# EAGLE board new-mainboard (EAGLE 9.5.2)
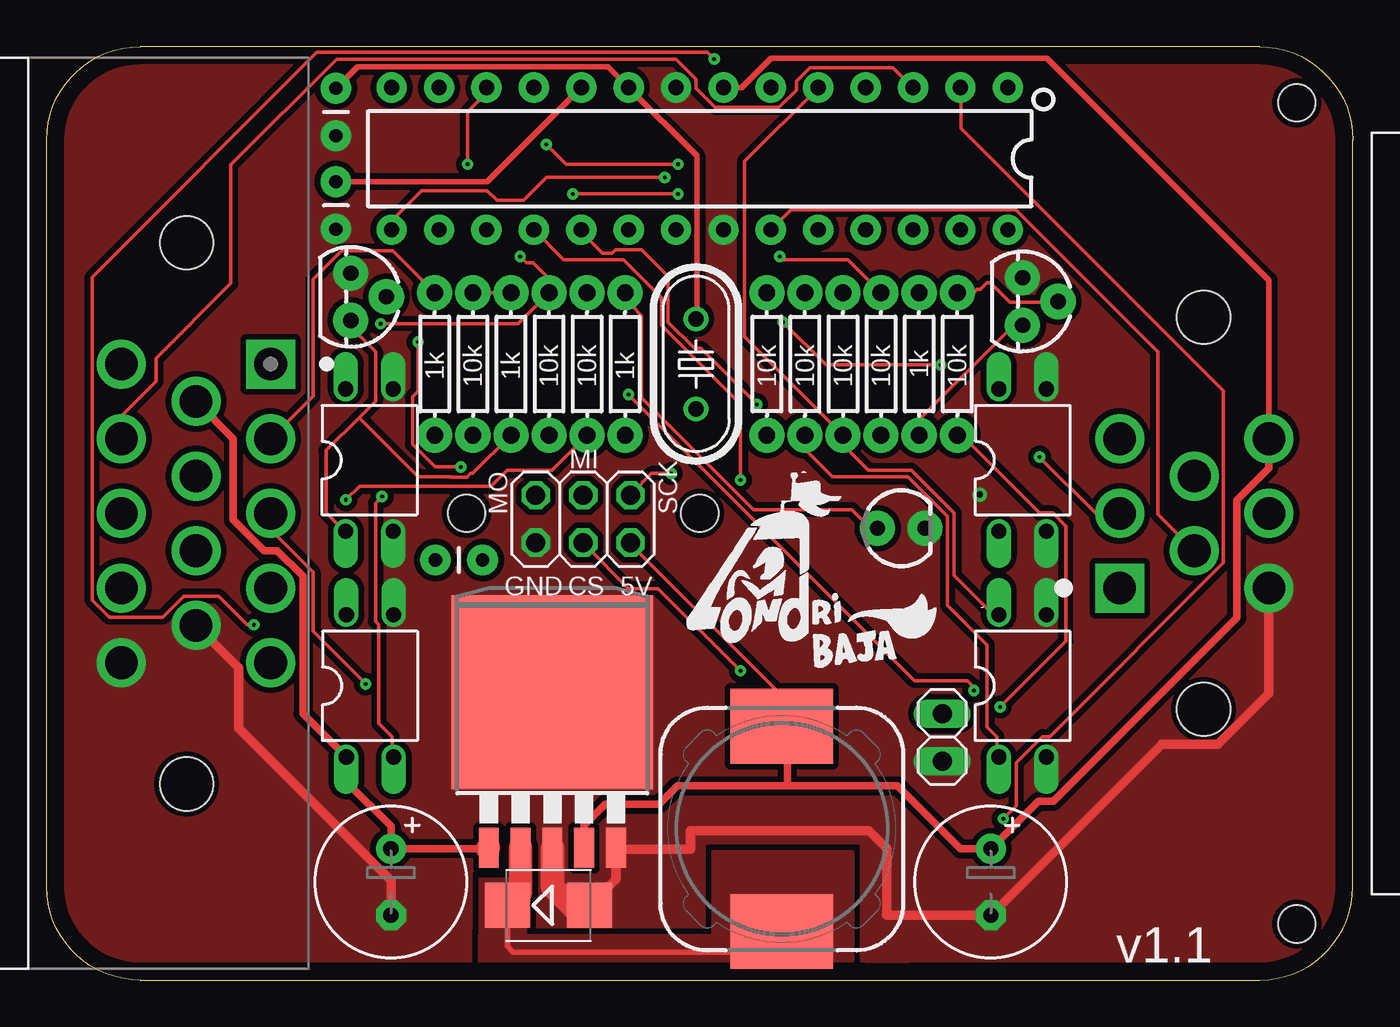
[diagram p0: board, top side]
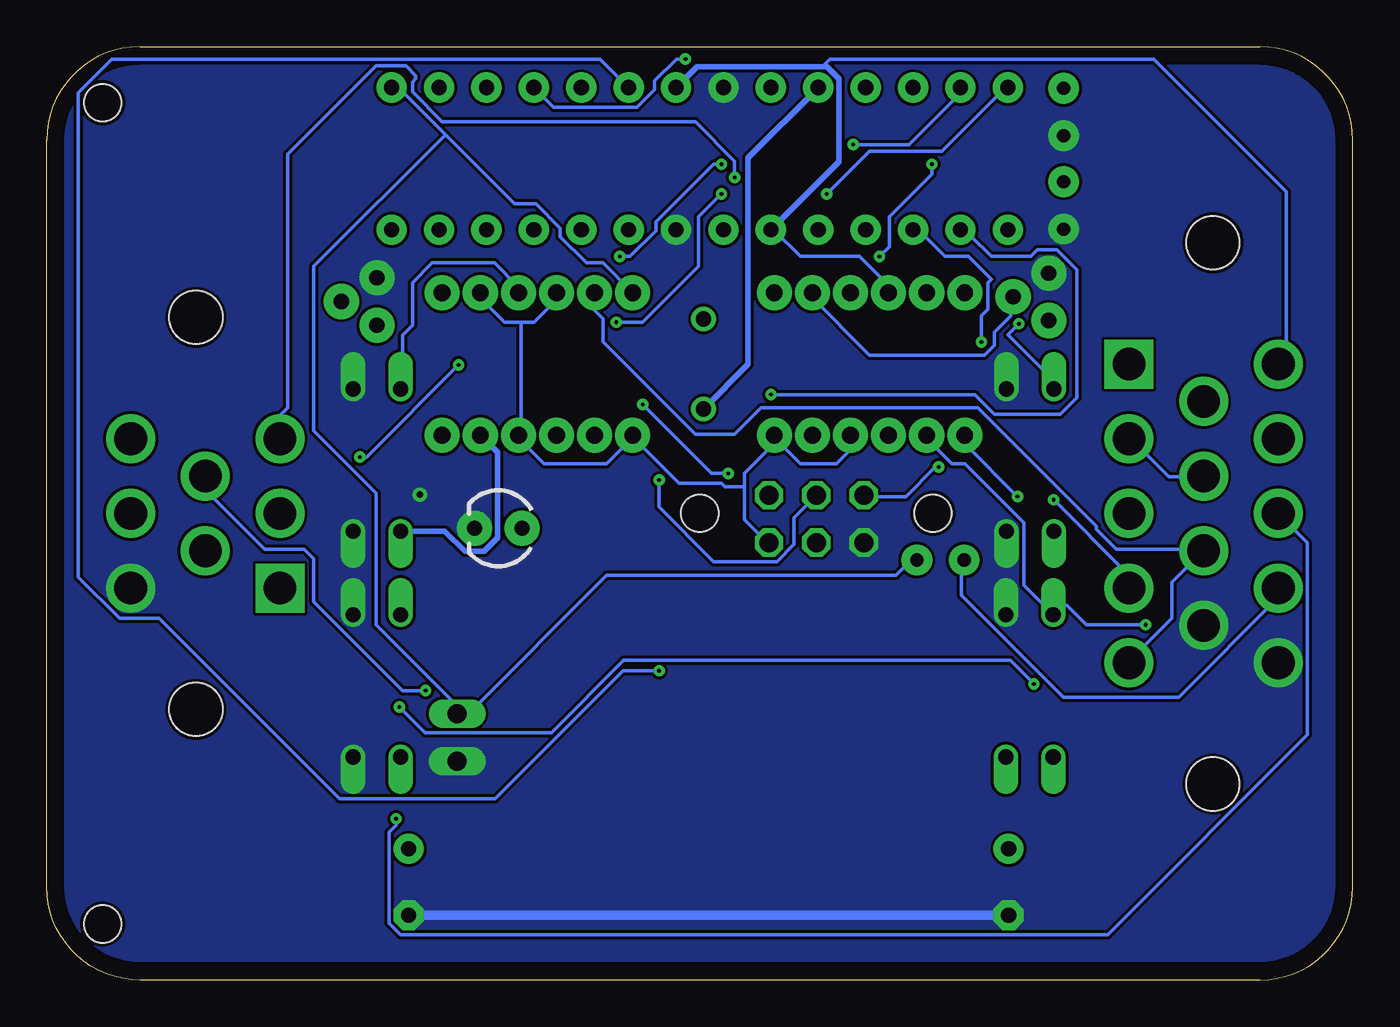
[diagram p1: board, bottom side, seen from below]

Size 70 x 50 mm. Coordinates in mm from the lower left corner, seen from the top.
Outline: 5,0 arc-90 0,5 0,45 arc-90 5,50 65,50 arc-90 70,45 70,5 arc-90 65,0 5,0
Copper layers (1*16): Top 0.035mm / dielectric 1.5mm / Bottom 0.035mm
Design rules "default *": minimum track width 0.2mm, minimum drill 0.2mm, track to track 6mil, track to pad 6mil, pad to pad 6mil, via to via 6mil, smd to smd 6mil, copper to edge 0.2mm, drill to drill 6mil, minimum pad ring 10mil, minimum via ring 8mil, stop-mask expansion 4mil, vias tented up to drill 0mil, thermal gap 10mil
Net classes: 0 default: width 0.125 mm
Holes 2 mm at 67,47 22.5,25 67,3 35,25

## Footprints (pad centres in the part's own frame; a part is rotated, then mirrored left to right if it is on the bottom)
CAP-PTH-2.54 = drill 0.7 pad 1.651: 1 -1.27,0; 2 1.27,0
E3,5-8 = drill 0.813 pad 1.6: + -1.778,0 | drill 0.813 pad 1.6 octagon: - 1.778,0
SMB = smd 2.4 x 2.4: A 2.2,0; C -2.2,0
LED_3MM = drill 0.813 pad 1.88: A -1.27,0; K 1.27,0
TO263-5 = smd 1.067 x 2.159: 1 -3.404,-5.791; 2 -1.702,-5.791; 3 0,-5.791; 4 1.702,-5.791; 5 3.404,-5.791 | smd 10.8 x 10.41: 6 0,2.54
TE_776266-1 = drill 1.75 square: 1 -8,4 | drill 1.75: 2 -4,4; 3 0,4; 4 4,4; 5 8,4; 6 -6,0; 7 -2,0; 8 2,0; 9 6,0; 10 -8,-4; 11 -4,-4; 12 0,-4; 13 4,-4; 14 8,-4 | hole 2.85: -14.5,-0.5; 14.5,-0.5
TE_1-776280-1 = drill 1.75 square: 1 -4,4.5 | drill 1.75: 2 0,4.5; 3 4,4.5; 4 -2,0.5; 5 2,0.5; 6 -4,-3.5; 7 0,-3.5; 8 4,-3.5 | hole 2.85: -10.5,0; 10.5,0
1X02 = drill 1.016 long: 1 -1.27,0; 2 1.27,0
2X03 = drill 1.016 octagon: 1 -2.54,-1.27; 2 -2.54,1.27; 3 0,-1.27; 4 0,1.27; 5 2.54,-1.27; 6 2.54,1.27
CDRH127/LD = smd 4 x 5.5: 1 -5.5,0; 2 5.5,0
DIL04 = drill 0.813 offset: 1 -1.27,-3.81; 2 1.27,-3.81; 3 1.27,3.81; 4 -1.27,3.81
TO-92 = drill 0.813 pad 1.88: 1 -1.27,0; 2 0,1.905; 3 1.27,0
HC49U-V = drill 0.813: 1 -2.413,0; 2 2.413,0
AXIAL-0.3 = drill 0.9 pad 1.88: P$1 -3.81,0; P$2 3.81,0
DIP28 = drill 0.813 pad 1.626: 1 -16.51,-3.81; 2 -13.97,-3.81; 3 -11.43,-3.81; 4 -8.89,-3.81; 5 -6.35,-3.81; 6 -3.81,-3.81; 7 -1.27,-3.81; 8 1.27,-3.81; 9 3.81,-3.81; 10 6.35,-3.81; 11 8.89,-3.81; 12 11.43,-3.81; 13 13.97,-3.81; 14 16.51,-3.81; 15 16.51,3.81; 16 13.97,3.81; 17 11.43,3.81; 18 8.89,3.81; 19 6.35,3.81; 20 3.81,3.81; 21 1.27,3.81; 22 -1.27,3.81; 23 -3.81,3.81; 24 -6.35,3.81; 25 -8.89,3.81; 26 -11.43,3.81; 27 -13.97,3.81; 28 -16.51,3.81

## Placement (x,y rotation side)
C1  22pF  [CAP-PTH-2.54]  15.5,46.5 270 top
C2  100uF/50V  [E3,5-8]  18.45,5.25 270 top
C3  100uF/50V  [E3,5-8]  50.6,5.25 270 top
C4  100nF  [CAP-PTH-2.54]  22.1,22.5 180 top
C6  22pF  [CAP-PTH-2.54]  15.5,41.5 270 top
D2  [SMB]  26.9,4 0 top
D5  [LED_3MM]  45.8,24.2 0 top
IC2  5V  [TO263-5]  27.1,12.88 0 top
J1  776266-1  [TE_776266-1]  8,25 270 top
J2  1-776280-1  [TE_1-776280-1]  62,25 90 top
JP1  [1X02]  48,13 270 top
JP2  [2X03]  28.75,24.7 0 top
L2  CDRH127/LD  [CDRH127/LD]  39.4,8.09 90 top
OK1  PC817  [DIL04]  52.3,27.85 0 top
OK2  PC817  [DIL04]  17.33,15.76 0 top
OK3  PC817  [DIL04]  17.3,27.85 0 top
OK4  PC817  [DIL04]  52.3,15.76 0 top
Q1  200mA/40V  [TO-92]  52.3,36.35 270 top
Q2  200mA/40V  [TO-92]  16.3,36.6 270 top
Q3  16Mhz  [HC49U-V]  34.8,33 270 top
R1  10k  [AXIAL-0.3]  44.72,33 270 top
R2  10k  [AXIAL-0.3]  26.92,33 270 top
R3  10k  [AXIAL-0.3]  22.84,33 90 top
R4  1k  [AXIAL-0.3]  46.76,33 90 top
R5  10k  [AXIAL-0.3]  42.68,33 90 top
R6  1k  [AXIAL-0.3]  24.88,33 90 top
R7  10k  [AXIAL-0.3]  40.64,33 270 top
R8  10k  [AXIAL-0.3]  38.59,33 270 top
R9  1k  [AXIAL-0.3]  20.8,33 270 top
R10  10k  [AXIAL-0.3]  28.96,33 90 top
R11  10k  [AXIAL-0.3]  48.8,33 90 top
R13  1k  [AXIAL-0.3]  31.01,33 270 top
U1  328P  [DIP28]  35,44 180 top

## Library data of the parts
C1 C4 C6 = SparkFun-Capacitors; PROD_ID: CAP-09128
C2 C3 = rcl; SPICEPREFIX: C
D2 = diode
D5 = SparkFun-LED; PROD_ID: DIO-08794
IC2 = linear
J1 = 776266-1; MANUFACTURER: TE CONNECTIVITY; PARTREV: B7; STANDARD: MANUFACTURER RECOMMENDATIONS
J2 = 1-776280-1; MANUFACTURER: TE Connectivity; METADATA: Manufacturer recommendations; PARTREV: F8
JP1 JP2 = pinhead
L2 = inductor-sumida
OK1-OK4 = optocoupler; MPN: PC817X4J000F; OC_FARNELL: 9707727; OC_NEWARK: 97K7059
Q1 Q2 = SparkFun-DiscreteSemi; PROD_ID: TRANS-08447
Q3 = adafruit; OC_FARNELL: 1666969; OC_NEWARK: unknown
R1-R3 R5 R7 R8 R10 R11 = SparkFun-Resistors; PROD_ID: RES-09435
R4 R6 R9 R13 = SparkFun-Resistors; PROD_ID: RES-08380
U1 = SparkFun-IC-Microcontroller; PROD_ID: IC-09136

## Nets
5V: C3.+ IC2.4 J1.10 J2.8 JP2.5 L2.2 R1.P$2 R2.P$2 R3.P$2 R4.P$2 R5.P$2 R6.P$2 R8.P$2 R13.P$2 U1.7 U1.20
COIL: J1.5 J1.8 R7.P$1
COIL-MCU: OK4.4 R5.P$1 U1.5
COMB1: J1.4 R10.P$1
COMB1-MCU: OK3.4 R2.P$1 U1.12
COMB2: J1.3 R11.P$1
COMB2-MCU: OK1.4 R1.P$1 U1.13
D4: JP2.3 U1.6
D11: JP2.2 U1.17
D12: JP2.4 U1.18
D13: JP2.6 U1.19
GND: C1.2 C2.- C3.- C6.2 D2.A D5.K IC2.3 IC2.5 IC2.6 J1.9 J1.14 J2.6 JP1.2 JP2.1 OK1.2 OK1.3 OK2.3 OK3.2 OK3.3 OK4.2 OK4.3 Q1.1 Q2.1 U1.8 U1.22
LATCH: J2.5 U1.16
N$1: OK4.1 R7.P$2
N$2: OK2.2 R9.P$2
N$3: OK1.1 Q1.3 R4.P$1
N$4: OK3.1 Q2.3 R6.P$1
N$5: C1.1 Q3.1 U1.9
N$6: C6.1 Q3.2 U1.10
N$7: Q2.2 R10.P$2
N$8: D5.A R13.P$1
N$9: Q1.2 R11.P$2
OE: J2.4 U1.23
OUT: D2.C IC2.2 L2.1
RST: C4.1 JP1.1 R8.P$1 U1.1
RST_IN: C4.2 J1.13
RX: J1.12 U1.2
SCK: J2.3 U1.15
SIN: J2.2 U1.14
TX: J1.11 U1.3
V_BATT: C2.+ IC2.1 J1.6 OK2.1
VEL: J1.2 J1.7 R9.P$1
VEL-MCU: OK2.4 R3.P$1 U1.4

## Tracks (layer width: path | path; a pad name or v marks a point on that pad's centre or on a via)
5V
  Top 0.2: R3.P$2 22.91,36.83 24.84,36.83 R6.P$2 | 39.7,12.4 39.65,12.51 39.47,12.69 39.47,13.57 L2.2 39.29,13.74 39.29,15.33 31.36,23.26 JP2.5
  Top 0.3: U1.7 37.23,47.81 38.81,49.39 53.61,49.39 65.5,37.5 J2.8
  Top 0.4: IC2.4 28.8,8.3 29.93,9.42 32.83,9.42 33.8,10.4 39.7,10.4 | 39.7,10.4 39.7,12.4 | J2.8 65.5,27.43 63.78,25.71 63.78,19.41 53.94,9.57 53.14,9.57 C3.+ 48.97,7.03 45.6,10.4 39.7,10.4
  Bottom 0.2: 44.58,35.24 45.46,35.24 46.87,36.65 R4.P$2 | 44.58,35.24 43.87,35.24 42.82,36.3 42.82,36.65 R5.P$2 | 32.6,26.43 32.6,27.14 31.01,28.72 31.01,29.07 | 32.6,26.43 32.6,24.67 31.36,23.43 JP2.5 | 31.01,29.07 29.6,27.66 27.66,27.66 26.96,28.37 26.96,29.07 R2.P$2 | 31.01,29.07 R13.P$2 | 38.59,29.07 36.12,26.61 33.83,26.61 33.65,26.43 32.6,26.43 | 38.59,29.07 40,27.66 43.34,27.66 44.23,28.54 44.23,28.72 44.58,29.07 R1.P$2 44.58,29.25 44.58,35.24 | 38.59,29.07 R8.P$2 | R6.P$2 25.02,36.83 25.02,37.35 26.43,38.76 29.6,38.76 31.01,40.17 U1.20 | J1.10 3.88,33.13 3.56,33.45 3.56,42.24 10.65,49.34 28.02,49.34 28.37,48.98 28.37,48.92
  Bottom 0.3: U1.7 35.16,48.92 28.37,48.92 28.19,48.92 27.54,48.27 27.54,43.84 U1.20
COIL
  Bottom 0.2: R7.P$1 40.7,36.65 40.7,35.95 40.17,35.42 40.17,34.18 35.24,29.25 33.13,29.25 31.72,30.66 20.09,30.66 13.74,24.32 13.74,24.14 12.69,23.08 8.11,23.08 J1.8 8.11,22.91 9.69,21.32 9.69,19.38 11.98,17.09 J1.5
COIL-MCU
  Top 0.2: OK4.4 50.92,19.73 50.57,19.73 48.63,21.67 48.63,25.02 46.34,27.31 44.05,27.31 42.82,28.54 42.82,29.07 R5.P$1 37.4,34.47 37.4,43.86 U1.5
COMB1  (via drill 0.2)
  Top 0.2: v16.03,25.73 16.77,26.46 23.81,26.46 24.67,27.31 27.09,27.31 R10.P$1
  Bottom 0.2: J1.4 12.16,21.16 12.16,21.85 v16.03,25.73
COMB1-MCU  (via drill 0.2)
  Top 0.2: v22.55,43.7 22.55,46.52 23.43,47.4 23.43,47.75 U1.12 | v25.37,38.76 25.73,38.41 26.08,38.41 26.78,37.71 26.78,36.83 R2.P$1 25.27,35.16 v17.9,35.16
  Bottom 0.2: v17.9,35.16 18.49,34.57 16.07,32.15 OK3.4 | v22.55,43.7 22.55,43.17 24.84,40.88 24.84,39.29 v25.37,38.76
COMB2  (via drill 0.2)
  Top 0.2: v51.1,14.62 54.62,18.15 54.62,24.32 53.92,25.02 53.21,25.02 49.16,29.07 48.81,29.07 R11.P$1 | v17.09,15.86 14.27,18.68 14.27,21.85 12.16,23.96 12.16,24.84 J1.3
  Bottom 0.2: v17.09,15.86 18.35,17.12 39.09,17.12 42.95,13.26 49.73,13.26 v51.1,14.62
COMB2-MCU  (via drill 0.2)
  Top 0.2: v26.78,44.76 27.84,43.7 v33.83,43.7 | v39.29,38.76 39.47,38.59 42.94,38.59 R1.P$1
  Bottom 0.2: OK1.4 50.92,31.72 50.92,34.53 50.39,35.06 50.39,37.35 49.34,38.41 45.99,38.41 44.76,37.18 44.76,36.83 R1.P$1 | v26.78,44.76 23.79,44.76 21.14,47.4 21.14,47.75 U1.13 | v39.29,38.76 38.73,38.76 37.35,40.14 37.35,40.61 34.27,43.7 v33.83,43.7
D4  (via drill 0.2)
  Top 0.2: v37.18,16.56 32.77,20.97 31.19,20.97 28.9,23.26 JP2.3
  Bottom 0.2: v37.18,16.56 39.12,16.56 45.96,9.72 54.3,9.72 63.96,19.38 66.09,19.38 68.3,21.59 68.3,47.54 66.5,49.34 40.34,49.34 U1.6
D11  (via drill 0.2)
  Top 0.2: v19.91,34.18 19.91,31.54 19.61,31.24 19.61,28.7 20.82,27.49 v22.2,27.49
  Bottom 0.2: v22.2,27.49 22.38,27.49 23.96,25.9 26.08,25.9 JP2.2 | v19.91,34.18 19.91,35.59 19.56,35.95 19.56,37.35 19.38,37.53 20.61,38.76 21.85,38.76 23.43,40.35 U1.17
D12  (via drill 0.2)
  Top 0.2: U1.18 27.71,38.59 30.91,38.59 32.95,36.55 32.95,35.06 37.18,30.84 v37.18,26.78
  Bottom 0.2: v37.18,26.78 37.18,25.34 34.25,22.42 30.87,22.42 29.95,23.33 29.95,24.77 JP2.4
D13  (via drill 0.2)
  Top 0.2: v33.48,27.14 32.42,27.14 31.36,26.08 JP2.6 | v38.06,30.84 35.06,33.83 34.71,33.83 33.3,35.24 33.3,37.71 31.89,39.12 30.48,39.12 30.31,38.94 29.78,38.94 28.54,40.17 U1.19
  Bottom 0.2: v33.48,27.14 34.36,27.14 v38.06,30.84
GND  (via drill 0.35)
  Top 0.5: J2.6 65.5,15.35 62.78,12.62 59.75,12.62 C3.- 45.03,3.47 | J1.9 10.29,16.71 10.29,13.49 18.45,5.33 C2.- | 45.03,3.47 45,3.5 | D2.A 30.5,5.4 IC2.5 30.59,7 34.5,7 34.5,8 44.07,8 45.03,7.04 45.03,3.47
  Top 1.27: 29.1,4.06 D2.A | IC2.3 27.1,5 28.2,3.9
  Bottom 0.5: C2.- C3.-
  other vias: 50,26
  pour Top (no thermals): 29.9,2.88 35,2.88 35,7.4 43.9,7.4 43.9,1 46.2,1 46.2,8.9 33.8,8.9 33.8,8.12 29.9,8.12
  pour Top (isolate 0.305, rank 6, no thermals): 5,1 65,1 arc90 69,5 69,45 arc90 65,49 5,49 arc90 1,45 1,5 arc90
  pour Bottom (no thermals): 1,44 1,5 arc90 5,1 6,1 65,1 arc90 69,5 69,45 arc90 65,49 5,49 arc90 1,45
LATCH  (via drill 0.2)
  Top 0.2: v31.19,31.36 46.52,16.03 49.34,16.03 49.69,15.68 v49.69,15.51
  Bottom 0.2: v31.19,31.36 20.26,31.36 19.21,30.31 15.68,30.31 14.8,31.19 14.8,38.06 15.86,39.12 16.91,39.12 17.27,38.76 19.38,38.76 20.44,39.82 20.61,39.82 20.97,40.17 U1.16 | v49.69,15.51 50.92,15.51 55.68,20.26 55.68,22.55 56.21,23.08 58.32,23.08 61.49,26.25 61.49,26.96 J2.5
N$1
  Top 0.2: OK4.1 50.92,11.98 50.92,13.04 50.39,13.57 50.39,17.97 48.28,20.09 48.28,24.84 46.16,26.96 42.11,26.96 40.7,28.37 40.7,29.07 R7.P$2
N$2  (via drill 0.2)
  Top 0.2: v17.97,25.9 17.62,25.55 17.62,19.21 17.8,19.03 17.8,13.74 18.5,13.04 18.5,11.98 OK2.2
  Bottom 0.2: v17.97,25.9 20.79,28.72 20.79,29.07 R9.P$2
N$3
  Top 0.2: Q1.3 52.28,35.06 51.82,35.06 46.76,30 R4.P$1
  Bottom 0.3: OK1.1 48.67,24.04 47.59,22.96 46.55,22.96 46.51,23 46.5,23 46.5,23.01 45.83,23.68 45.83,28.26 R4.P$1
N$4
  Top 0.2: 16.74,30.13 17.62,31.01 17.62,33.65 16.39,34.89 16.39,35.24 Q2.3 | 16.74,30.13 14.98,28.37 14.98,25.02 15.86,24.14 OK3.1 | 16.74,30.13 19.91,26.96 21.67,26.96 21.7,26.93 22.53,26.93 22.73,27.14 22.83,27.14 R6.P$1
N$5
  Top 0.3: Q3.1 34.84,35.46 34.84,44.16 U1.9 30.07,48.92 16.66,48.92 C1.1
N$6
  Top 0.3: U1.10 23.61,42.77 C6.1
  Bottom 0.3: U1.10 32.41,44.05 32.41,32.98 Q3.2
N$7
  Bottom 0.2: Q2.2 18.32,36.47 18.32,35.59 19.21,34.71 19.21,34.01 19.73,33.48 25.9,33.48 29.07,36.65 R10.P$2
N$8
  Top 0.2: R13.P$1 31.01,36.65 31.36,36.3 31.36,36.12 31.89,35.59 31.89,31.19 37.88,25.2 43.17,25.2 44.05,24.32 44.4,24.32 D5.A
N$9
  Top 0.2: Q1.2 54.09,36.3 51.63,36.3 50.57,37.35 50.39,37.35 50.04,37 49.87,37 49.69,36.83 48.81,36.83 R11.P$2
OE
  Top 0.2: U1.23 39.88,41.26 51.95,41.26 59.56,33.65 59.56,24.94 J2.4
OUT
  Top 0.3: D2.C 24.7,1.8 25,1.5 39,1.5 39.5,2
  Top 1.27: IC2.2 25.4,4.7 D2.C
  pour Top (no thermals): 23.2,2.4 35.71,2.4 35.71,6.9 43.19,6.9 43.19,1 23.2,1
  pour Top (no thermals): 23.2,5.4 23.2,2.4 25.7,2.4 25.7,5.4
RST
  Bottom 0.2: 48.63,45.28 44.93,41.58 43.78,41.58 42.48,40.28 42.48,39.81 41.08,38.41 40.2,38.41 R8.P$1 | 48.63,45.28 51.1,47.75 51.45,47.75 U1.1 | C4.1 23.43,22.38 23.79,22.38 24.49,21.67 40,21.67 47.4,14.27 47.93,14.27 JP1.1 48.1,14.27 48.1,14.8 52.33,19.03 52.33,26.08 55.68,29.43 55.68,38.23 48.63,45.28
RST_IN
  Bottom 0.2: C4.2 20.97,22.38 20.97,20.61 15.51,15.15 9.34,15.15 4.05,20.44 4.05,20.97 J1.13
RX  (via drill 0.2)
  Top 0.2: U1.2 48.98,47.8 48.98,45.64 63.06,31.55 63.06,22.35 53.75,13.04 53.37,13.04 51.98,11.65 51.98,9.34 v51.27,8.63
  Bottom 0.2: v51.27,8.63 51.27,8.28 51.65,7.9 51.65,3.04 51.04,2.42 13.14,2.42 2.44,13.12 2.44,23.43 J1.12
SCK  (via drill 0.2)
  Top 0.2: v33.13,42.99 26.78,42.99 25.55,41.76 24.14,41.76 23.61,42.29 20.09,42.29 18.5,40.7 18.5,40.35 U1.15
  Bottom 0.2: v33.13,42.99 33.13,43.87 35.24,45.99 48.81,45.99 50.39,47.57 50.39,48.1 50.22,48.28 50.22,48.45 50.75,48.98 52.33,48.98 57.09,44.23 57.09,30.66 57.44,30.31 57.44,29.07 J2.3
SIN  (via drill 0.2)
  Top 0.2: v33.83,42.11 v28.19,42.11 | v39.47,35.24 41.76,32.95 v47.93,32.95 | v53.21,28.02 56.21,25.02 57.44,25.02 J2.2
  Bottom 0.2: v28.19,42.11 25.9,44.4 22.02,44.4 19.03,47.4 18.85,47.4 18.5,47.75 U1.14 | v33.83,42.11 35.06,40.88 35.06,38.23 38.06,35.24 v39.47,35.24 | v47.93,32.95 52.86,28.02 v53.21,28.02
TX
  Top 0.2: U1.3 45.37,48.88 40.91,48.88 40.17,48.14 40.17,47.67 39.25,46.74 35.83,46.74 34.8,47.78 34.8,48.25 33.72,49.33 15.53,49.33 9.87,43.66 9.87,37.32 5.87,33.32 5.87,32.07 4,30.2 J1.11
V_BATT
  Top 0.4: 23.64,7.03 C2.+ 18.45,8.24 16.06,10.63 OK2.1 13.74,14.27 13.74,21.62 12.36,23 11.64,23 10,24.64 10,29 J1.6
  Top 1.27: IC2.1 23.64,7.03
VEL
  Top 0.2: J1.2 14.27,31.27 14.27,37.53 15.81,39.06 18.55,39.06 R9.P$1
  Bottom 0.2: J1.7 8.11,26.96 9.87,26.96 11.98,29.07 J1.2
VEL-MCU  (via drill 0.2)
  Top 0.2: v35.77,49.34 35.42,49.69 14.48,49.69 2.44,37.65 2.44,20.35 3.35,19.43 6.22,19.43 7.35,20.57 9.21,20.57 10.75,19.03 v11.1,19.03
  Bottom 0.2: R3.P$1 22.91,29.07 21.5,27.66 20.79,27.66 17.62,24.49 17.62,21.14 16.21,19.73 OK2.4 16.03,19.73 15.68,20.09 15.33,20.09 14.27,19.03 v11.1,19.03 | v35.77,49.34 36.25,49.34 37.42,48.17 37.42,47.69 38.37,46.74 42.83,46.74 U1.4

## Text on the board
tNames: 1k | 10k | 1k | 10k | 10k | 1k | 10k | 10k | 10k | 10k | 1k | 10k | MI | MO | SCK | GND | CS | 5V | v1.1